# Altium PCB STM32_Board.PcbDoc (part 1 of 2)
Units mil, origin at the board's own origin, x right, y up, seen from the top; angles counter-clockwise.
Board outline 3248.03 x 2755.91 mil, 2 copper layers (Top Layer, Bottom Layer), stack 60.433 mil thick; 70 components, 76 nets, 326 pads, 150 vias.
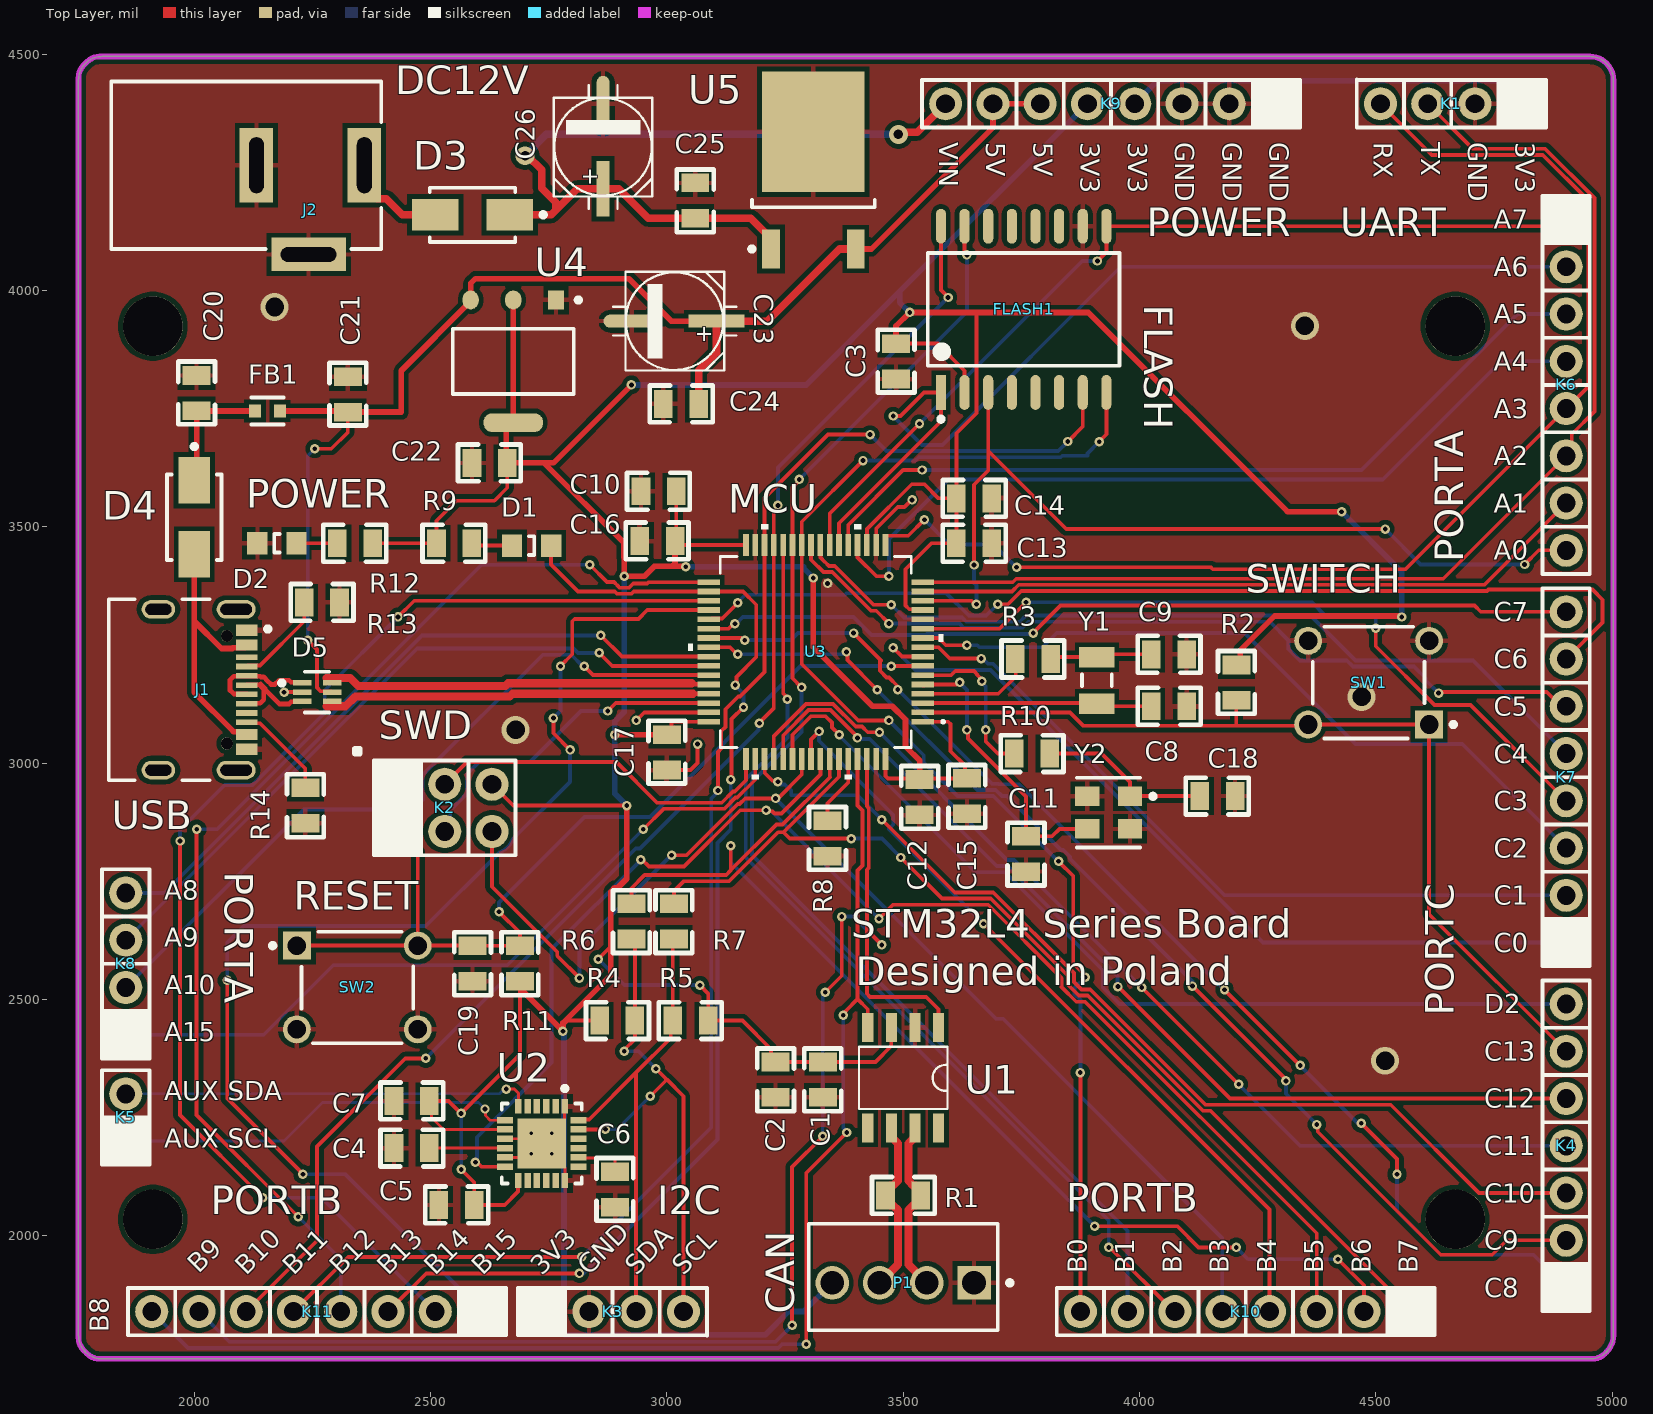
[diagram p0: Top Layer view]
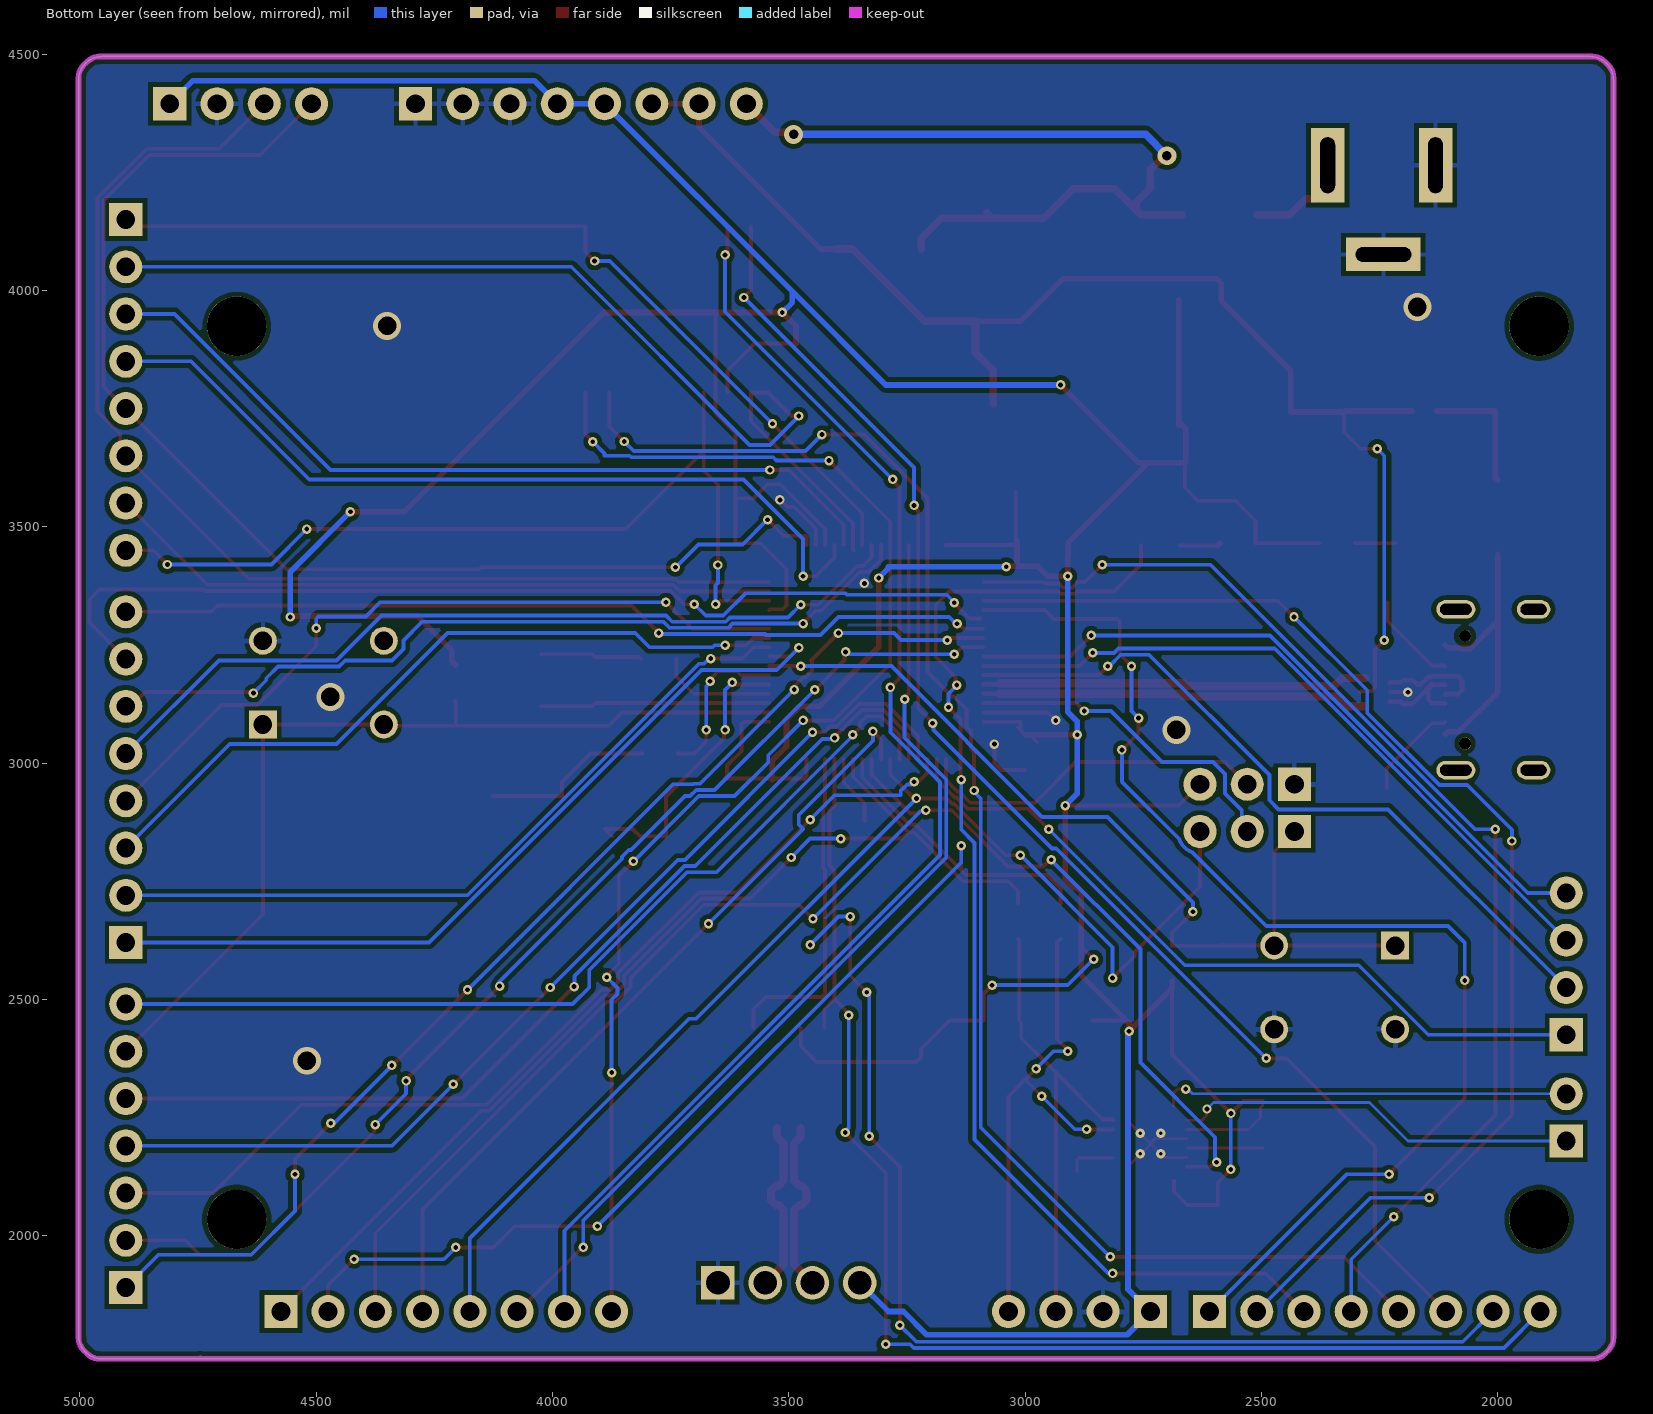
[diagram p1: Bottom Layer view, seen from below]
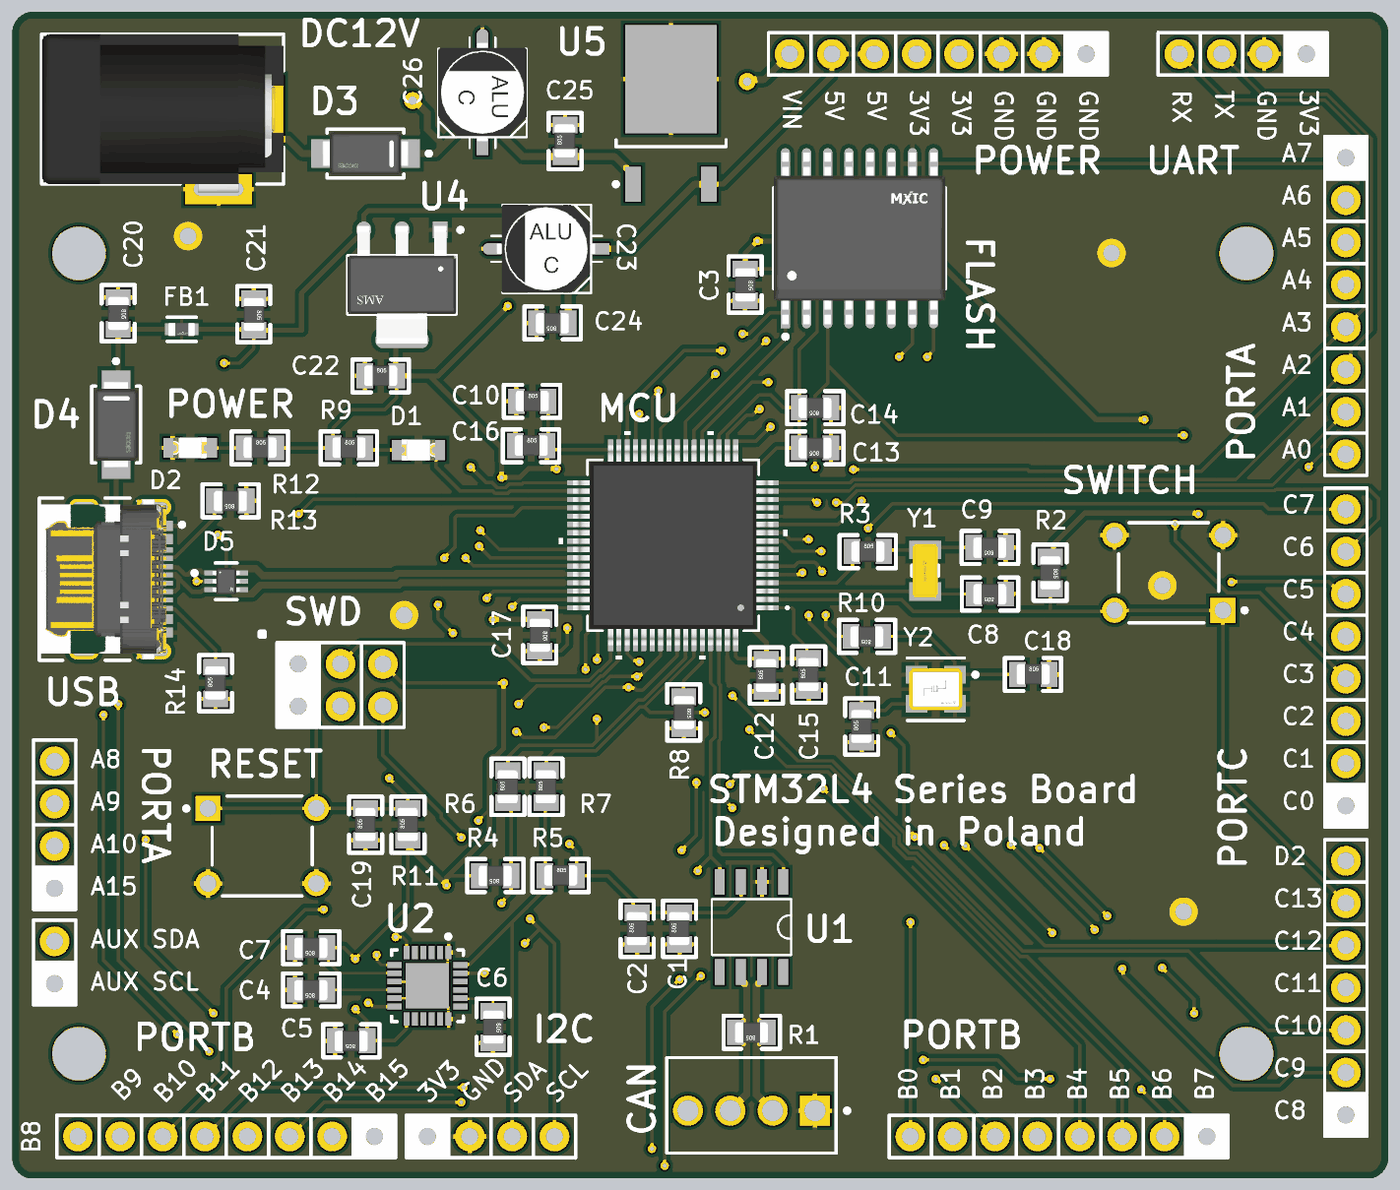
[diagram p3: 3D render of the assembled board from above, using the file's embedded part models]

## Layer stack, top to bottom
Top Solder: solder mask 0.4, Solder Resist, Dk 3.8
Top Layer: signal copper 1.378
Dielectric 1: dielectric 57.6772, FR-4, Dk 4.5
Bottom Layer: signal copper 1.378
Bottom Solder: solder mask 0.4, Solder Resist, Dk 3.8

## Board outline
1755,1789.09 ccw(c1805,1789.09) 1805,1739.09 4953.03,1739.09 ccw(c4953.03,1789.09) 5003.03,1789.09 5003.03,4445 ccw(c4953.03,4445) 4953.03,4495 1805,4495 ccw(c1805,4445) 1755,4445

## Design rules (kind name [scope] priority, off if disabled: settings)
Clearance [All] p1: gap=10 ignorepadtopadclearanceinfootprint=FALSE except(0: Arc-Hole Track-Hole SMDPad-Hole THPad-Hole Via-Hole Fill-Hole Poly-Hole Region-Hole Text-Hole; 3.94: SMDPad-THPad; 5: Arc-Arc Arc-Track Track-Track SMDPad-SMDPad; 5.91: Arc-Text Track-Text SMDPad-Text THPad-Text Via-Text Fill-Text Poly-Text Region-Text Text-Text; 7.87: Arc-SMDPad Arc-THPad Track-SMDPad Track-THPad SMDPad-Via THPad-Via; 19.68: THPad-THPad)
DiffPairsRouting DiffPairsRouting_2 [InDifferentialPair('USB_D')] p1: maxlimit=5 minlimit=5 mostfreqgap=5 toplayer_minwidth=10 toplayer_maxwidth=17.23 toplayer_prefwidth=17.23 bottomlayer_minwidth=10 bottomlayer_maxwidth=17.23 bottomlayer_prefwidth=17.23 impedanceprofiledriven=TRUE impedanceprofileid={769F5DE0-8025-4589-B34F-DB9C566C1EF3} impedanceprofilevalue=90.000000 maxuncoupledlength=500
DiffPairsRouting DiffPairsRouting_1 [InDifferentialPair('CAN')] p2: maxlimit=5 minlimit=5 mostfreqgap=5 toplayer_minwidth=17.23 toplayer_maxwidth=17.23 toplayer_prefwidth=17.23 bottomlayer_minwidth=17.23 bottomlayer_maxwidth=17.23 bottomlayer_prefwidth=17.23 impedanceprofiledriven=TRUE impedanceprofileid={769F5DE0-8025-4589-B34F-DB9C566C1EF3} impedanceprofilevalue=90.000000 maxuncoupledlength=500
DiffPairsRouting [InDifferentialPair('USB_CONN_D')] p3: maxlimit=5 minlimit=5 mostfreqgap=5 toplayer_minwidth=10 toplayer_maxwidth=17.23 toplayer_prefwidth=17.23 bottomlayer_minwidth=10 bottomlayer_maxwidth=17.23 bottomlayer_prefwidth=17.23 impedanceprofiledriven=TRUE impedanceprofileid={769F5DE0-8025-4589-B34F-DB9C566C1EF3} impedanceprofilevalue=90.000000 maxuncoupledlength=500
HoleSize [All] p1: absolutevalues=TRUE maxlimit=248.03 minlimit=7.87 maxpercent=80.000 minpercent=20.000
HoleToHoleClearance [All] p1: gap=19.68 allowstackedmicrovias=TRUE
MinimumSolderMaskSliver MinimumSolderMaskSliver_1 [HasFootprint('IS-QFN-24_V')] p1: minsoldermaskwidth=0.39
MinimumSolderMaskSliver [All] p2: minsoldermaskwidth=3.94
PlaneConnect PlaneConnect_1 [InNet('GND')] p1: pad.planeconnectstyle=Relief pad.reliefexpansion=20 pad.reliefentries=4 pad.reliefconductorwidth=10 pad.reliefairgap=10 via.planeconnectstyle=Direct via.reliefexpansion=20 via.reliefentries=4 via.reliefconductorwidth=10 via.reliefairgap=10
PlaneConnect [All] p2: planeconnectstyle=Relief reliefexpansion=20 reliefentries=4 reliefconductorwidth=10 reliefairgap=10
PolygonConnect PolygonConnect_1 [InNet('GND')] p1: thpad.connectstyle=Relief thpad.reliefconductorwidth=10 thpad.reliefentries=4 thpad.polygonreliefangle="90 Angle" thpad.airgapwidth=10 smdpad.connectstyle=Relief smdpad.reliefconductorwidth=10 smdpad.reliefentries=4 smdpad.polygonreliefangle="90 Angle" smdpad.airgapwidth=10 via.connectstyle=Direct via.reliefconductorwidth=10 via.reliefentries=4 via.polygonreliefangle="90 Angle" via.airgapwidth=10
PolygonConnect [All] p2: connectstyle=Relief reliefconductorwidth=10 reliefentries=4 polygonreliefangle="90 Angle" airgapwidth=10
RoutingVias [All] p1: holewidth=20 width=40 viastyle="Through Hole" minholewidth=7.87 minwidth=13.78 maxholewidth=248.03 maxwidth=253.94
SilkToSilkClearance [All] p1: silktosilkclearance=5.91
SilkToSolderMaskClearance [IsPad] p1: minsilkscreentomaskgap=0 clearancetoexposedcopper=TRUE
SolderMaskExpansion [All] p1: expansion=4 istentingtop=FALSE
Width [All] p1: maxlimit=1968.5 minlimit=5 preferedwidth=10 minimp=50.000000 maximp=50.000000 favimp=50.000000
23 further rules are at their usual default settings.

## Classes and differential pairs
component class STM32_Board_with_IMU: C1 C2 C3 C4 C5 C6 C7 C8 C9 C10 C11 C12 C13 C14 C15 C16 C17 C18 C19 D1 FLASH1 K1 K2 K3 K4 K5 K6 K7 K8 K10 K11 P1 R1 R2 R3 R4 R5 R6 R7 R8 R9 R10 R11 SW1 SW2 U1 U2 Y1 Y2
component class PowerSupplyAndUSB: C20 C21 C22 C23 C24 C25 C26 D2 D3 D4 D5 FB1 J1 J2 K9 R12 R13 R14 U4 U5
differential pair USB_CONN_D: +USB_CONN_D_P -USB_CONN_D_N
differential pair USB_D: +USB_D_P -USB_D_N
differential pair CAN: +CAN_P -CAN_N

## Components (designator, comment, footprint, x,y, rotation, side; value= is the part's Value field where it differs from the comment)
C1 "22p" 0805 3330,2330 r90 top
C2 "22p" 0805 3230,2330 r90 top
C3 "100n" 0805 3485,3850 r270 top
C4 "100n" 0805 2460,2185 r180 top
C5 "0.1u" 0805 2555,2065 r180 top
C6 "2.2n" 0805 2890,2097.4 r270 top
C7 "10n" 0805 2460,2285 r180 top
C8 "22p" 0805 4062.6,3120 r180 top
C9 "22p" 0805 4062.4,3230 r180 top
C10 "2.2u" 0805 2982.6,3575 r0 top
C11 "32p" 0805 3760,2807.6 r90 top
C12 "100n" 0805 3535,2927.6 r90 top
C13 "100n" 0805 3650,3465 r180 top
C14 "100n" 0805 3650,3560 r180 top
C15 "100n" 0805 3635,2930 r90 top
C16 "100n" 0805 2980,3470 r0 top
C17 "100n" 0805 3000,3022.6 r270 top
C18 "32p" 0805 4165,2930 r0 top
C19 "100n" 0805 2589,2575.75 r90 top
C20 "2.2u" 0805 2005,3782.6 r270 top
C21 "2.2u" 0805 2325,3780 r270 top
C22 "22u" 0805 2625,3635 r0 top
C23 "C+47U-6V3" PANACAP-C 3015,3935 r180 top
C24 "100n" 0805 3030,3760 r180 top
C25 "100n" 0805 3060,4190 r90 top
C26 "C+47U-6V3" PANACAP-C 2865,4305 r90 top
D1 "LED SMD 0805 Green" 0805_PAD 2713.66,3460 r180 top
D2 "LED SMD 0805 Green" 0805_PAD 2175,3465 r0 top
D3 "ES2DA-13-F" FP-SMA-MFG 2588.74,4160 r180 top value=25pF
D4 "ES2DA-13-F" FP-SMA-MFG 2000,3520 r270 top value=25pF
D5 "USBLC6-2P6" FP-SOT-666-MFG 2260,3150 r0 top
FB1 "120R" FP-BLM18-0_15-t0_8-MFG 2155,3745 r0 top
FLASH1 "MX25L51245GMI-08G" FP-MX25L51245GMI-08G-IPC_C 3755,3960 r90 top
J1 "USB4105-GF-A" FP-USB4105-GF-A-MFG 1970,3155 r270 top
J2 "694106301002" 694106301002 2110,4265 r270 top
K1 "USART2" HEADER-1X4 4810,4395 r270 top
K2 "SWD Connector" HEADER-2X3 2430,2855 r90 top
K3 "I2C1" HEADER-1X4 2735,1839.09 r90 top
K4 "PORTC_PART2" HEADER-1X7 4903.03,1890 r180 top
K5 "IMU_EXTERNAL_SENSOR" HEADER-1X2 1855,2200 r180 top
K6 "PORTA_PART1" HEADER-1X8 4903.03,4150 r0 top
K7 "PORTC_PART1" HEADER-1X8 4903.03,2620 r180 top
K8 "PORTA_PART2" HEADER-1X4 1855,2425 r180 top
K9 "POWER" HEADER-1X8 4290,4395 r270 top
K10 "PORTB_PART1" HEADER-1X8 4575,1839.09 r270 top
K11 "PORTB_PART2" HEADER-1X8 2610,1839.09 r270 top
P1 "CAN" TECO-640456-4 3500,1900 r0 top
R1 "120R" 0805 3500,2085 r180 top
R2 "10k" 0805 4205,3170 r270 top
R3 "0R" 0805 3775,3220 r0 top
R4 "2.2k" 0805 2895,2455 r180 top
R5 "2.2k" 0805 3050,2455 r0 top
R6 "0R" 0805 2925,2665 r90 top
R7 "0R" 0805 3015,2665 r90 top
R8 "10k" 0805 3340,2840 r270 top
R9 "560" 0805 2550,3465 r0 top
R10 "0R" 0805 3772.4,3020 r180 top
R11 "10k" 0805 2689,2575.75 r90 top
R12 "560R" 0805 2340,3465 r0 top
R13 "5.1k" 0805 2270,3340 r180 top
R14 "5.1k" 0805 2235,2910 r90 top
SW1 "B3F-1000" OMRON-B3F-1000-4_V 4485,3170 r180 top
SW2 "B3F-1000" OMRON-B3F-1000-4_V 2345,2525 r0 top
U1 "TCAN332GDR" SOIC-8_x1 3575,2440 r270 top
U2 "MPU-6050" IS-QFN-24_V 2735,2195 r270 top
U3 "STM32L476RGT6" LQFP64-10x10mm_STM 3315,3235 r180 top
U4 "AMS1117-3.3" FP-AMS1117-IPC_C 2675,3850 r270 top
U5 "L7805CDT-TR" TO-252_N 3310,4255 r90 top
Y1 "ABS07-32.768KHZ-T" FP-ABS07-MFG 3910,3175 r270 top
Y2 "ABM8-25.000MHZ-B2-T" FP-ABM8-MFG 3935,2895 r180 top

## Footprints (in the part's own frame and the unit in brackets; to place one, negate y for a bottom-side part, rotate by r counter-clockwise, add the part's x,y. Pads: shape width x height; smd on the part's side, far side on the other; paste and mask are expansions set on the pad)
0805 [mm]
  rect 1x1.5 smd: 1(-0.95,0) 2(0.95,0)
  silkscreen extent -1.7,-0.99 1.68,0.99, body extent -1,-0.61 1,0.64, height 0.81
0805_PAD [mm] "Chip LED, 2-Leads, Body 2.0x1.3mm, IPC Medium Density"
  rect 1.1x1.2 smd: 1(-1.05,0) 2(1.05,0)
  silkscreen extent -0.15,-0.5 0.15,0.5, body extent -1,-0.62 1,0.63, height 0.68
694106301002 [mm] "DC Power Jack Right Angled(6.4)"
  rect 4x1.8 hole 0.8 slot 3 at 0 deg: 1(0,6.35) 2(0,0.55)
  rect 1.8x4 hole 0.8 slot 3 at 90 deg: 3(4.8,3.35)
  silkscreen extent -4.5,-7.25 4.5,7.25, body extent -4.5,-7.25 5,7.25, height 10.75
FP-ABM8-MFG [mm]
  rect 1.3x1.05 smd paste+0 mask+0: 1(-1.15,-0.875) 2(1.15,-0.875) 3(1.15,0.875) 4(-1.15,0.875)
  silkscreen extent -2.5,-1.88 1.7,1.88, body extent -1.9,-1.5 1.9,1.5, height 0.25
FP-ABS07-MFG [mm]
  rect 1.1x1.9 smd paste+0 mask+0: 1(-1.25,0) 2(1.25,0)
  silkscreen extent -0.33,-0.8 0.33,0.8, body extent -1.9,-1.05 1.9,1.05, height 0.25
FP-AMS1117-IPC_C [mm]
  rect 1.004x0.872 smd paste+0 mask+0: 1(-3.295,2.29)
  rrect100% 1.004x0.872 smd paste+0 mask+0: 2(-3.295,0) 3(-3.295,-2.29)
  rrect87% 1.004x3.182 smd paste+0 mask+0: 4(3.295,0)
  silkscreen extent -3.42,-3.25 1.75,3.63, body extent -3.9,-3.35 3.9,3.35, height 0.25
FP-BLM18-0_15-t0_8-MFG [mm]
  rect 0.65x0.7 smd paste+0 mask+0: 1(-0.675,0) 2(0.675,0)
  silkscreen extent -0.87,-0.72 0.87,0.72, body extent -1.1,-0.58 1.1,0.58, height 0.25
FP-MX25L51245GMI-08G-IPC_C [mil]
  rect 73.78x21.34 smd paste+0 mask+0: 1(-175.83,175)
  rrect100% 73.78x21.34 smd paste+0 mask+0: 2(-175.83,125) 3(-175.83,75) 4(-175.83,25) 5(-175.83,-25) 6(-175.83,-75) 7(-175.83,-125) 8(-175.83,-175) 9(175.83,-175) 10(175.83,-125) 11(175.83,-75) 12(175.83,-25) 13(175.83,25) 14(175.83,75) 15(175.83,125) 16(175.83,175)
  silkscreen extent -237,-203 119,203, body extent -217,-207 217,207, height 10
FP-SMA-MFG [mm]
  rect 2.5x1.7 smd paste+0 mask+0: 1(-2,0) 2(2,0)
  silkscreen extent -3.93,-1.46 2.3,1.46, body extent -3.35,-1.56 3.35,1.56, height 0.25
FP-SOT-666-MFG [mm]
  rect 0.99x0.3 smd paste+0 mask+0: 1(-0.805,0.5) 2(-0.805,0) 3(-0.805,-0.5) 4(0.805,-0.5) 5(0.805,0) 6(0.805,0.5)
  silkscreen extent -2.02,-1.1 0.65,1.1, body extent -1.4,-0.95 1.4,0.95, height 0.25
FP-USB4105-GF-A-MFG [mm]
  rrect100% 1x2.1 hole 1.7 slot 0.6 at 0 deg paste-1000 mask+0: 1(-4.32,3.015) 2(4.32,3.015)
  rrect100% 1x1.8 hole 1.4 slot 0.6 at 0 deg paste-1000 mask+0: 3(-4.32,-1.165) 4(4.32,-1.165)
  rect 0.6x1.15 smd paste+0 mask+0: A1-B12(-3.2,3.59) A4-B9(-2.4,3.59) B1-A12(3.2,3.59) B4-A9(2.4,3.59)
  rect 0.3x1.15 smd paste+0 mask+0: A5(-1.25,3.59) A6(-0.25,3.59) A7(0.25,3.59) A8(1.25,3.59) B5(1.75,3.59) B6(0.75,3.59) B7(-0.75,3.59) B8(-1.75,3.59)
  round 0.65 hole 0.65 unplated paste-1000 mask+0: ""(-2.89,2.515) ""(2.89,2.515)
  silkscreen extent -4.86,-3.84 4.86,4.84, body extent -4.96,-3.94 4.96,4.27, height 0.25
HEADER-1X2 [mil]
  rect 70x70 hole 40: 1(0,0)
  round 70 hole 40: 2(0,-100)
  silkscreen extent -50,-150 50,50, body extent -50,-150 50,50, height 470
HEADER-1X4 [mil]
  rect 70x70 hole 40: 1(0,0)
  round 70 hole 40: 2(0,-100) 3(0,-200) 4(0,-300)
  silkscreen extent -51,-350 50,50, body extent -50,-350 50,50, height 470
HEADER-1X7 [mil]
  rect 70x70 hole 40: 1(0,0)
  round 70 hole 40: 2(0,-100) 3(0,-200) 4(0,-300) 5(0,-400) 6(0,-500) 7(0,-600)
  silkscreen extent -50,-650 50,50, body extent -50,-650 50,50, height 470
HEADER-1X8 [mil]
  rect 70x70 hole 40: 1(0,0)
  round 70 hole 40: 2(0,-100) 3(0,-200) 4(0,-300) 5(0,-400) 6(0,-500) 7(0,-600) 8(0,-700)
  silkscreen extent -50,-750 50,50, body extent -50,-750 50,50, height 470
HEADER-2X3 [mil]
  rect 70x70 hole 40: 1(0,0) 2(100,0)
  round 70 hole 40: 3(0,-100) 4(100,-100) 5(0,-200) 6(100,-200)
  silkscreen extent -50,-250 150,50, body extent -50,-250 150,50, height 470
IS-QFN-24_V [mm] "QFN, 24-Leads, Body 4x4mm, Pitch 0.5mm, Thermal Pad 2.7x2.6mm"
  rect 0.8x0.35 smd: 1(-2,1.25) 2(-2,0.75) 3(-2,0.25) 4(-2,-0.25) 5(-2,-0.75) 6(-2,-1.25) 13(2,-1.25) 14(2,-0.75) 15(2,-0.25) 16(2,0.25) 17(2,0.75) 18(2,1.25)
  rect 0.35x0.85 smd mask+0.102: 7(-1.25,-1.975) 8(-0.75,-1.975) 9(-0.25,-1.975) 10(0.25,-1.975) 11(0.75,-1.975) 12(1.25,-1.975) 19(1.25,1.975) 20(0.75,1.975) 21(0.25,1.975) 22(-0.25,1.975) 23(-0.75,1.975) 24(-1.25,1.975)
  rect 2.7x2.6 smd: 25(0,0)
  silkscreen extent -3.07,-2.15 2.15,2.15, body extent -2,-2 2,2, height 0.95
LQFP64-10x10mm_STM [mil]
  rect 47x12 smd paste+0 mask+0: 1(-226.38,147.64) 2(-226.38,127.95) 3(-226.38,108.27) 4(-226.38,88.58) 5(-226.38,68.9) 6(-226.38,49.21) 7(-226.38,29.53) 8(-226.38,9.84) 9(-226.38,-9.84) 10(-226.38,-29.53) 11(-226.38,-49.21) 12(-226.38,-68.9) 13(-226.38,-88.58) 14(-226.38,-108.27) 15(-226.38,-127.95) 16(-226.38,-147.64) 33(226.38,-147.64) 34(226.38,-127.95) 35(226.38,-108.27) 36(226.38,-88.58) 37(226.38,-68.9) 38(226.38,-49.21) 39(226.38,-29.53) 40(226.38,-9.84) 41(226.38,9.84) 42(226.38,29.53) 43(226.38,49.21) 44(226.38,68.9) 45(226.38,88.58) 46(226.38,108.27) 47(226.38,127.95) 48(226.38,147.64)
  rect 12x47 smd paste+0 mask+0: 17(-147.64,-226.38) 18(-127.95,-226.38) 19(-108.27,-226.38) 20(-88.58,-226.38) 21(-68.9,-226.38) 22(-49.21,-226.38) 23(-29.53,-226.38) 24(-9.84,-226.38) 25(9.84,-226.38) 26(29.53,-226.38) 27(49.21,-226.38) 28(68.9,-226.38) 29(88.58,-226.38) 30(108.27,-226.38) 31(127.95,-226.38) 32(147.64,-226.38) 49(147.64,226.38) 50(127.95,226.38) 51(108.27,226.38) 52(88.58,226.38) 53(68.9,226.38) 54(49.21,226.38) 55(29.53,226.38) 56(9.84,226.38) 57(-9.84,226.38) 58(-29.53,226.38) 59(-49.21,226.38) 60(-68.9,226.38) 61(-88.58,226.38) 62(-108.27,226.38) 63(-127.95,226.38) 64(-147.64,226.38)
  silkscreen extent -273,-270 270,270, body extent -236,-236 236,236, height 63
OMRON-B3F-1000-4_V [mm] "TH, 4-Leads, Body 6x6mm"
  rect 1.5x1.5 hole 1 paste+0: 1(-3.25,2.25)
  round 1.5 hole 1 paste+0: 2(3.25,2.25) 4(3.25,-2.25)
  round 1.5 hole 1 paste+0 mask+0.102: 3(-3.25,-2.25)
  silkscreen extent -4.68,-3 3,3, body extent -3,-3 3,3, height 4.5
PANACAP-C [mm]
  rect 3x0.7 smd: +(-2.286,0)
  oval 3x0.7 smd: -(2.286,0)
  silkscreen extent -3.35,-2.65 3.28,2.65, body extent -2.95,-2.65 2.95,2.65, height 5.41
SOIC-8_x1 [mm]
  rect 1.55x0.6 smd: 1(0,0) 2(0,-1.27) 3(0,-2.54) 4(0,-3.81) 5(5.4,-3.81) 6(5.4,-2.54) 7(5.4,-1.27) 8(5.4,0)
  silkscreen extent 1.02,-4.28 4.38,0.48, body extent 0.61,-4.5 4.77,0.7, height 1.75
TECO-640456-4 [mm] "Through Hole, 4-Leads, Body 10.16x5.72mm, Pitch 2.54mm"
  rect 1.8x1.8 hole 1.27 paste+0: 1(3.81,0)
  round 1.8 hole 1.27 paste+0: 2(1.27,0) 3(-1.27,0) 4(-3.81,0)
  silkscreen extent -5.08,-2.54 5.86,3.18, body extent -5.08,-2.54 5.08,3.18, height 10.03
TO-252_N [mm] "D-PAK, 4-Leads, Body 6.1x6.5mm, Pitch 2.28mm, Lead Span 9.7mm, IPC Medium Density"
  rect 2.1x0.95 smd: 1(-4.25,2.28) 3(-4.25,-2.28)
  rect 6.5x5.5 smd: 4(2.05,0)
  silkscreen extent -4.37,-3.3 -1.6,3.43, body extent -2,-3.3 4.2,3.3, height 2.4

## Part data
C1 C2 C3 C4 C5 C6 C7 C8 C9 C10 C11 C12 C13 C14 C15 C16 C17 C18 C19 C20 C21 C22 C24 C25: library part Kondensator
C23 C26: "GENERIC CAPACITOR POLARISED", Supplier Part Number 1=PCE4375TR-ND, Supplier 1=Digi-Key
D1 D2: "WURTH ELEKTRONIK - 150080GS75000 - LED, Green, SMD, 0805, 30 mA, 3.2 V, 520 nm", Case Code (Imperial)=0805, Case Code (Metric)=2012, Color=Green, Forward Current=30mA, Forward Voltage=3.2V, Lens Color=Colorless, Manufacturer="Wurth Electronics", Manufacturer Part Number=150080GS75000, Max Operating Temperature=85°C, Min Operating Temperature=-40°C, Package Quantity=1, Test Current=20mA, Case/Package=0805, Category=LEDs, ComponentLink1Description=https://datasheet.ciiva.com/29563/150080gs75000-29563008.pdf?src-supplier=Digi-Key, ComponentLink1URL=https://datasheet.ciiva.com/29563/150080gs75000-29563008.pdf?src-supplier=Digi-Key, ComponentLink2Description=https://datasheet.ciiva.com/29279/759434-da-01-en-chipled-0805-w-kl-gruen-150080gs75000-29279039.pdf?src-supplier=Conrad, ComponentLink2URL=https://datasheet.ciiva.com/29279/759434-da-01-en-chipled-0805-w-kl-gruen-150080gs75000-29279039.pdf?src-supplier=Conrad, Dominant Wavelength=520nm, Height=0.8mm, Length=2mm, Lens Size=1.25mm, Lens Style=Clear,Flat,Rectangular, Lens Transparency=Clear, Luminous Intensity=450mcd, Mounting Technology="Surface Mount", Packaging="Cut Tape", Reach SVHC Compliant=Unknown, RoHS=Yes, RoHS Compliant=Yes, Series=WL-SMCW, Stock 1=31800, Supplier 1=Rs, Viewing Angle=140°, Wavelength=520nm, Width=1.25mm
D3 D4: library part CMP-12791-000014-1, "DIODE GEN PURP 200V 2A SMA", Capacitance=25pF, Forward Current=2A, Manufacturer="Diodes Inc.", Max Junction Temp=+150°C, Max Repetitive Reverse Voltage=200V, Max Surge Forward Current=50A, Package=SMA, Peak Reverse Current=5uA, Temperature="-55°C to +150°C", Temperature Range Low=-55°C, Automotive=No, Category=Diode, ComponentLink2Description=Datasheet, ComponentLink2URL=https://www.diodes.com/assets/Datasheets/ds14002.pdf, Device Class L1="Discrete Semiconductors", Device Class L2=Diodes, Device Class L3="Rectifier Diodes", Digikey Description="DIODE GEN PURP 200V 2A SMA", Footprint Url=https://www.diodes.com/assets/Package-Files/SMA.pdf, Height=2.4mm, Lead Free=Yes, Manufacturer Part Number=ES2DA-13-F, Mouser Description="Rectifiers RECTIFIER SUPER FAST \"F\" LEAD FREE", Octopart=https://octopart.com/es2da-13-f-diodes+inc.-328903, Reverse Voltage=200V, RoHS=TRUE, Standoff Height=0.05mm, Temperature Range High=+150°C
D5: library part CMP-12225-000058-1, "TVS DIODE 5.25V 17V SOT666", Breakdown Voltage=6V, Capacitance=3.5pF, Case/Package=SOT-666, Clamping Voltage=17V, Leakage Current=150nA, Max Operating Temperature=125°C, Min Operating Temperature=-40°C, Operating Supply Voltage=5V, Package Quantity=1, Peak Pulse Current=5A, Power Line Protection=Yes, Test Current=1mA, Contact Plating=Tin, Depth=1.3mm, Direction=Unidirectional, Element Configuration=Dual, ESD Protection=Yes, Height=0.6mm, Lead Free="Lead Free", Length=1.7mm, Max Breakdown Voltage=6V, Max Reverse Leakage Current=150nA, Min Breakdown Voltage=6V, Mount="Surface Mount", Number of Bidirectional Channels=2, Number of Channels=2, Number of Elements=1, Number of Pins=6, Packaging="Tape and Reel", Polarity=Unidirectional, Radiation Hardening=No, REACH SVHC="No SVHC", Reverse Breakdown Voltage=6V, Reverse Standoff Voltage=5V, Termination=SMD/SMT, Width=1.3mm, Working Voltage=5V
FB1: library part CMP-0686-00437-3, "Chip Ferrite Bead, 0603, 120Ω @ 100MHz, 0.18Ω, 25%, 800mA", Case/Package=0603, Current Rating=500mA, DC Resistance (DCR)=180mR, Max Operating Temperature=125°C, Min Operating Temperature=-55°C, Package Quantity=1000, Tolerance=25%, Height=0.8mm, Impedance=120R, Length=1.6mm, Max DC Current=500mA, Number of Circuits=1, Number of Pins=2, Packaging=Bulk, RoHS Compliant=Yes, Series=BLM18A, Shielding=Unshielded, Termination=SMD/SMT, Width=0.8mm
FLASH1: library part CMP-105207-000008-1, "IC FLASH 512MBIT SPI/QUAD 16SOP", RoHS Compliant=Yes
J1: library part CMP-245163-000001-1, "CONN RCPT USB2.0 TYPEC 5A", Current Rating=5/6.25/1.25/0.25A, Manufacturer=GCT, Package=0, Temperature="-40°C to +85°C", Temperature Range High=+85°C, Temperature Range Low=-40°C, Voltage Rating=20V, Automotive=No, Category=Conn, ComponentLink2Description=Datasheet, ComponentLink2URL=https://gct.co/files/drawings/usb4105.pdf, Conn Orientation="Right Angle", Contact Material=Gold,Nickel, Device Class L1=Connectors, Device Class L2="USB Connectors", Device Class L3=unset, Digikey Description="CONN RCPT USB2.0 TYPEC 5A", Height=3.46mm, Is Female=yes, Lead Free=Yes, Manufacturer Part Number=USB4105-GF-A, Number Of Contacts=16, Octopart=https://octopart.com/usb4105-gf-a-gct-106627878, RoHS=TRUE, Usb Standard="USB 2.0"
J2: library part CMP-1502-00188-1, "DC Power Jack Connector WR-DC, Male, Right Angled, THT, 5 A, 24 V", Manufacturer="Wurth Elektronik", Operating Temperature=-40to85degC, Rated Current=5A, Working Voltage=24V, Datasheet URL=http://katalog.we-online.de/em/datasheet/6941xx301002.pdf, Gender=Male, Manufacturer URL=http://www.we-online.de, Mounting Technology=THT, Opening Diameter=6.4mm, Orientation=RightAngled, Package Reference=694106301002, Packaging=Bag, Part Number=694106301002, Plug Inner Diameter=2.05mm, Plug Outer Diameter=5.5mm, Publisher=WurthElektronik
K1 K3 K8: library part HEADER-1X4, Supplier Part Number 1=S1011E-36-ND, Supplier 1=Digi-Key
K2: library part HEADER-2X3
K4: library part HEADER-1X7, Supplier Part Number 1=S1011E-36-ND, Supplier 1=Digi-Key
K5: library part HEADER-1X2, Supplier Part Number 1=S1011E-36-ND, REEL=TH, Supplier 1=Digi-Key
K6 K7 K9 K10 K11: library part HEADER-1X8, Supplier Part Number 1=S1011E-36-ND, Supplier 1=Digi-Key
P1: library part CMP-2000-05419-1, "Male Header, Pitch 2.54 mm, 1 x 4 Position, Height 10.03 mm, Tail Length 3.56 mm, RoHS, Bulk", Color=White, Current, Rating="5 /  / A", Flammability Rating=UL94V-0, Manufacturer="TE Connectivity", Temperature, Operating="-55to+105 /  / degC", Voltage, Rating="250 /  / V", Agency Approvals=CSA,UL, Angle=Straight, Brand/Series=MTA-100Series, Color, Housing=White, Connector Type=MTA-100, Contact Centerline Spacing="0.100 /  / in.", Contact Mating Area Plating=Tin, Contact Plating=Tin, Contact Shape=Square, Contact Termination Area Plating=Tin, Datasheet URL=https://datasheet.ciiva.com/16286/eng-ds-82056-mta-0608-16286228.pdf, Datasheet Version=Dec-14, Length, Overall="0.4 /  / \"", Length, Pin="0.14 /  / \"", Length, Terminal Post="0.14 /  / in.", Manufacturer URL=http://www.te.com/, Material, Contact=CopperAlloy, Material, Housing=Polyester, Mount Angle=Vertical, Mounting Hole Size="0.04 /  / \"", Mounting Type=PCMount, Number Of Contacts=4, Number of Positions=4, Number of Rows=1, Pin Spacing="0.1 /  / \"", Primary Type=InterconnectSystem, Size, Post="0.025 /  / in.", Special Features=Pinstrip, Standards=RoHSCompliant,ELVCompliant,UL94V-0, Termination=Solder, Type=PCBPlug
R1 R2 R3 R4 R5 R6 R7 R8 R9 R10 R11 R12 R13 R14: library part Rezystor
SW1 SW2: library part CMP-1677-00002-1, "Tactile Switch, SPST-NO, 0.05 A, 5 to 24 V, -25 to 70 degC, 4-Pin THD, RoHS, Bulk", Capacitance="-45 f", Current Rating="1.5 A", Max Operating Temperature="70 degC", Min Operating Temperature="-40 degC", Package Quantity=1080, Voltage Rating="150 V", ComponentLink1Description="Manufacturer URL", ComponentLink1URL=http://www.omron.com/, ComponentLink2Description=Datasheet, ComponentLink2URL=http://www.omron.com/ecb/products/pdf/en-b3f.pdf, Contact Material=Brass, Contact Plating=Gold, DatasheetVersion=Jan-15, Gender=Female, Height="14.99 mm", Lead Pitch="1.27 mm", Length="18.34 mm", Mount="Through Hole", PackageDescription="4-Pin Through Hole Device, Body 6 x 6 mm", PackageReference=B3F-1000, Packaging=Tray, Pins=8, Radiation Hardening=No, RoHSCompliant=true, Shielding=Shielded, Width="25.4 mm"
U1: "Can Transceiver"
U2: library part CMP-1753-00002-2, "3-Axis Gyroscope, Accelerometer and a Digital Motion Processor(TM) (DMP), 2.375 to 3.46 V, -40 to 85 degC, 24-Pin QFN, RoHS, Tape and Reel", Manufacturer=InvenSense, Standard Package=5,000, Category=Sensors,Transducers, Datasheet URL=http://datasheet.octopart.com/MPU-6050-InvenSense-datasheet-14421344.pdf, Datasheet Version="Rev. 3.3, 05/2012", Dynamic Catalog=MPU-6000™Series, Family=Multifunction, Featured Product=MPU-60506-Axis,IntegratedI²CSolution, Manufacturer URL=http://www.invensense.com/, Online Catalog=MPU-6000™Series, Other Names="1428-1007-2 / MPU6050", Output Type=Digital, Sensor Type=MotionTracking, Unit PriceUSD=Digital
U3: "No Description Available", Mfr_Name=STMicroelectronics, RefDes=RefDes, Type=Type
U4: library part CMP-209535-000001-1, "LDO Voltage Regulators 1A, 3.3V", Dropout Voltage=1.1V, Manufacturer="Advanced Monolithic Systems", Max Junction Temp=+125°C, Max Power Dissipation=1.2W, Max Supply Voltage=15V, Nominal Supply Current=5mA, Output Current=1A, Output Voltage=3.3V, Package=AMS1117, Temperature="-40°C to +125°C", Temperature Range Low=-40°C, Automotive=No, Category=IC, ComponentLink2Description=Datasheet, ComponentLink2URL=http://www.advanced-monolithic.com/pdf/ds1117.pdf, Device Class L1="Integrated Circuits (ICs)", Device Class L2="Power Management ICs", Device Class L3="Voltage Regulators - Linear", Height=1.8mm, Ipc Land Pattern Name=SOT229P700X180-4, Lead Free=Yes, Manufacturer Part Number=AMS1117-3.3, Number Of Outputs=1, Octopart=https://octopart.com/ams1117-3.3-advanced+monolithic+systems-25899300, Output Type=Fixed, RoHS=TRUE, Standoff Height=0.64mm, Temperature Range High=+125°C
U5: library part CMP-0244-00216-1, "Positive Voltage Regulator, 3-Pin DPAK, Tape and Reel", ComponentLink1Description="Manufacturer URL", ComponentLink1URL=http://www.st.com, ComponentLink2Description=Datasheet, ComponentLink2URL=http://www.st.com/internet/com/TECHNICAL_RESOURCES/TECHNICAL_LITERATURE/DATASHEET/CD00000444.pdf, DatasheetVersion=16/11/2011, PackageDescription="3-Pin Transistor Outline Package 2.28 mm Pitch, 9.7 mm Lead Span (DPAK)", PackageReference=TO-252, PackageVersion=2011
Y1: library part CMP-0447-00001-4, "Crystal 32.768kHz ±20ppm (Tol) 12.5pF FUND 70kΩ 2-Pin CSMD T/R", Case/Package=CSMD, ESR (Equivalent Series Resistance)=70kR, Frequency=32.768kHz, Frequency Tolerance=20ppm, Load Capacitance=12.5pF, Max Operating Temperature=85°C, Min Operating Temperature=-40°C, Operating Frequency="32.768 kHz", Package Quantity=3000, Depth=1.5mm, Height=0.9mm, Lead Free="Lead Free", Length=3.2mm, Number of Pins=2, Packaging="Tape and Reel", Radiation Hardening=No, REACH SVHC="No SVHC", RoHS Compliant=Yes, Series=ABS07, Series Resistance=70kR, Termination=SMD/SMT, Tolerance=20ppm, Width=1.5mm
Y2: library part CMP-27762-013668-1, "Crystal 25MHz ±20ppm 18pF SMD-4 3.2mm x 2.5mm", Case/Package=CSMD, ESR (Equivalent Series Resistance)=50R, Frequency=25MHz, Frequency Stability=50ppm, Frequency Tolerance=20ppm, Load Capacitance=18pF, Max Operating Temperature=70°C, Min Operating Temperature=-20°C, Operating Frequency="25 MHz", Package Quantity=1000, Resistor Type=Ceramic, Depth=2.5mm, Height=0.031inch, Lead Free="Lead Free", Length=3.2mm, Mount="Surface Mount", Number of Pins=4, Packaging="Tape and Reel", Radiation Hardening=No, REACH SVHC="No SVHC", Series=ABM8, Series Resistance=50R, Termination=SMD/SMT, Tolerance=20ppm, Width=0.098inch

## Free pads (board coordinates)
  round 125.98 hole 125.98: MH(1912.48,2034.37) MH(1912.48,3924.13) MH(4668.39,2034.37) MH(4668.39,3924.13)

## Via types
v1: diameter 20, hole 10, Top Layer to Bottom Layer, 139 vias
v2: diameter 59.06, hole 39.37, Top Layer to Bottom Layer, 5 vias
v3: diameter 19.68, hole 7.87, Top Layer to Bottom Layer, 4 vias
v4: diameter 40, hole 20, Top Layer to Bottom Layer, 2 vias

## Nets (pads, with @x,y where several pads share a name; then routed paths per layer and width w, separated by ;. In a path a pad name is that pad's centre, name@x,y a point inside that pad or via, vN(x,y) a via of type N, cw(c..) or ccw(c..) an arc to the next point about the centre after c; other vN are vias at no path point)
+3V3: C1.2 C2.2 C3.1 C5.1 C7.1 C10.2 C12.2 C13.2 C14.2 C15.2 C16.2 C17.1 C22.2 FLASH1.2 K1.1 K2.6 K3.1 K9.4 K9.5 P1.4 R2.1 R4.2 R5.2 R9.1 R11.1 R12.2 U1.3 U2.8 U2.13 U3.1 U3.13 U3.19 U3.32 U3.48 U3.64 U4.2 U4.4 | length 13315.5
  Top Layer w6: C7.1@2497.4,2285 2497.4,2275.16 2501.72,2270.84 2501.72,2249.99 2527.18,2224.53 U2.8@2657.24,2224.53
  Top Layer w8: R12.2@2377.4,3465 R9.1@2512.6,3465 2512.6,3512.6 2555,3555 2635,3555 2662.4,3582.4 C22.2@2662.4,3625.16 ; C7.1@2497.4,2285 2538.21,2285 v1(2564.64,2258.57) 2689,2382.92 R11.1@2689,2523.4 ; v1(2565,2140) 2592.4,2112.6 C5.1@2592.4,2065 2656.98,2065 2685.21,2093.23 2685.21,2115.68 U2.13@2685.79,2116.26 ; K2.6@2630,2955 2675,2910 v1(2915,2910) v1@2913.13,2908.13 ; C22.2@2660.48,3623.23 C22.2@2662.4,3625.16 ; C22.2@2662.4,3635 C22.2@2662.4,3625.16 ; 2780.14,2445.14 2790,2455 R4.2@2857.6,2455 ; v1(2855,2585) 2880,2610 2881.6,2610 ; C17.1@2974.47,3044.31 C17.1@2990.16,3060 ; C17.1@3000,3060 C17.1@3009.69,3069.69 ; C17.1@3015.69,3075.69 C17.1@3009.69,3069.69 ; C10.2@3020,3575 3020,3472.6 C16.2@3017.4,3470 3026.02,3461.38 U3.32@3167.36,3461.38 ; v1(3070,2530) 3087.4,2512.6 R5.2@3087.4,2455 3160,2455 3220.6,2394.4 3220.6,2376.8 C2.2@3230,2367.4 C1.2@3330,2367.4 3441.29,2367.4 3475,2401.11 U1.3@3475,2440 ; U3.48@3088.62,3087.36 3009.69,3087.36 C17.1@3009.69,3069.69 ; U3.19@3423.27,3461.38 3423.27,3495.09 3518.18,3590 3545,3590 3575,3560 C14.2@3612.6,3560 ; U3.64@3462.64,3008.62 3462.64,2972.47 3467.71,2967.4 3535,2967.4 C15.2@3635,2967.4 3630.6,2971.8 3630.6,2994.4 3600,3025 3600,3082.68 3595.31,3087.36 U3.1@3541.38,3087.36 ; C3.1@3485,3887.4 3572.6,3887.4 3630,3830 FLASH1.2@3630,3784.17 ; U3.13@3541.38,3323.58 3539.57,3325.39 3512.96,3325.39 3505,3333.35 3505,3410 3560,3465 C13.2@3612.6,3465 C14.2@3612.6,3560 ; 3655,3953.36 3655,3740 3612.6,3697.6 C14.2@3612.6,3560
  Top Layer w12: U4.4@2669.54,3714.81 U4.4@2675,3720.28 ; U4.4@2675,3714.81 U4.4@2675,3720.28 ; U4.2@2675,3979.72 U4.4@2675,3720.28 ; R11.1@2689,2538.35 2689,2523.4 v1(2780.14,2432.27) 2780.14,2445.14 2780.14,2450.14 2881.6,2551.6 2881.6,2610 2881.6,2727.83 2889.73,2735.96 2895.96,2735.96 2915,2755 v1(2915,2910) ; v1(2890,3060) 2990.16,3060 C17.1@3000,3060 ; v1(2925,3800) 2760,3635 2740,3635 ; C16.2@3017.4,3470 3017.4,3422.4 3011.38,3416.38 ; v1(3040,3415) 3038.62,3416.38 3011.38,3416.38 ; v1(3310,3391.45) 3310,3245 3435,3120 3476.77,3120 3505,3091.77 3505,3035 3535,3005 3535,2967.4 C12.2@3535,2965 ; C3.1@3485,3887.4 3485,3924.55 v1(3513.81,3953.36) 3655,3953.36 3891.64,3953.36 4313.17,3531.83 v1(4427.64,3531.83) ; R2.1@4205,3207.4 4213.06,3215.46 4213.06,3238.06 4286,3311 4547.32,3311 4547.81,3310.51 4553.47,3310.51 v1(4555,3308.98) ; U4.4@2675,3720.28 2672.92,3720.28 2660,3707.36 2660,3637.4 C22.2@2662.4,3635 2740,3635 ; 2740,3635 2909.04,3465.96 2909.04,3434.73 2910,3433.76 v1(2910,3395) 2952.24,3395 2973.62,3416.38 3011.38,3416.38
  Bottom Layer w8: v1(2564.64,2258.57) 2564.82,2258.39 2564.82,2140.18 v1(2565,2140) ; v1(2855,2585) 2910,2530 v1(3070,2530)
  Bottom Layer w12: v1(2780.14,2432.27) 2780.14,2430.1 2782.5,2427.74 2782.5,1886.59 K3.1@2735,1839.09 2783.87,1790.22 3208.45,1790.22 3257.71,1839.48 3289.48,1839.48 P1.4@3350,1900 ; v1(2910,3395) 2910,3108.23 2890,3088.23 v1(2890,3060) 2890,2935 v1(2915,2910) ; v1(2925,3800) 3295,3800 3492.5,3997.5 ; v1(3040,3415) 3290,3415 3290,3411.45 v1(3310,3391.45) ; v1(3513.81,3953.36) 3492.5,3974.67 3492.5,3997.5 ; v1(4427.64,3531.83) 4555,3404.47 v1(4555,3308.98) ; K1.1@4810,4395 4761.13,4443.87 4038.87,4443.87 K9.4@3990,4395 K9.5@3890,4395 3492.5,3997.5
+5V: C21.2 C23.+ C24.1 D5.5 FB1.2 K9.6 K9.7 U4.3 U5.3 | length 2930.6
  Top Layer w8: v1(2240,3260) 2259.67,3240.33 2259.67,3159.52 2267.29,3151.91 2289.79,3151.91 D5.5@2291.69,3150 ; v1(2255,3665) 2290,3665 2325,3700 C21.2@2325,3742.6
  Top Layer w12: FB1.2@2181.57,3745 2315.16,3745 2322.6,3745 C21.2@2325,3742.6 2437.87,3742.6 2437.87,3830.15 2584.84,3977.12 U4.3@2584.84,3979.72 2584.84,4014.84 2595,4025 2919.38,4025 3009.38,3935 3067.4,3935 3073.18,3935 C23.+@3105,3935 ; U5.3@3399.76,4087.68 3432.68,4087.68 3690,4345 K9.7@3690,4395 K9.6@3790,4395
  Top Layer w16: C24.1@3067.4,3760 3067.4,3830.63 3095.17,3858.39 3095.63,3858.39 3105,3867.76 C23.+@3105,3935 3212.89,3935 3365.57,4087.68 U5.3@3399.76,4087.68
  Bottom Layer w8: v1(2240,3260) 2240,3650 v1(2255,3665)
CAN_N: P1.2 R1.1 U1.7 | length 377
  Top Layer w17.23: U1.7@3525,2227.4 3525,2208.7 3511.12,2194.82 3511.12,2116.01 3521.21,2105.91 3526.33,2105.91 3537.4,2094.84 R1.1@3537.4,2085 3537.4,2075.16 3526.33,2064.09 3521.21,2064.09 3511.12,2053.99 3511.12,1938.88 P1.2@3550,1900
CAN_P: P1.3 R1.2 U1.6 | length 377
  Top Layer w17.23: P1.3@3450,1900 3488.88,1938.88 3488.88,2053.99 3478.79,2064.09 3473.67,2064.09 3462.6,2075.16 R1.2@3462.6,2085 3462.6,2094.84 3473.67,2105.91 3478.79,2105.91 3488.88,2116.01 3488.88,2194.82 3475,2208.7 U1.6@3475,2227.4
FLASH_RESET: FLASH1.3 K6.8 U3.14 | length 1914.2
  Top Layer w8: U3.14@3541.38,3343.27 3644.49,3343.27 3651.75,3336 v1(3655,3336) ; v1(3650,3419) 3650,3588.6 3680,3618.6 3680,3660 ; FLASH1.3@3680,3784.17 3680,3660 ; v1(4520,3495) 3845,3495 3680,3660 ; v1(4815,3420) 4845,3450 K6.8@4903.03,3450
  Bottom Layer w8: v1(3650,3419) 3650,3381.15 3655,3376.15 v1(3655,3336) ; v1(4520,3495) 4595,3420 v1(4815,3420)
GND: C1.1 C2.1 C3.2 C4.2 C5.2 C6.2 C7.2 C8.1 C9.1 C10.1 C11.1 C12.1 C13.1 C14.1 C15.1 C16.1 C17.2 C18.2 C19.1 C20.1 C21.1 C22.1 C23.- C24.2 C25.2 C26.- D2.1 D5.2 FLASH1.10 J1.A1-B12 J1.B1-A12 J2.2 J2.3 K1.2 K2.2 K3.2 K9.1 K9.2 K9.3 P1.1 R8.2 R13.1 R14.1 SW1.3 SW1.4 SW2.3 SW2.4 U1.2 U2.1 U2.9 U2.11 U2.18 U2.25 U3.12 U3.18 U3.31 U3.47 U3.63 U4.1 U5.4 Y2.2 Y2.4 | length 825.1
  Top Layer w6: U2.11@2657.24,2165.47 2705.47,2165.47 v3(2713.35,2173.35) U2.25@2735,2195 ; U2.9@2657.24,2204.84 U2.25@2725.16,2204.84 ; U2.18@2784.21,2116.26 2784.21,2143.82 2735,2193.03 U2.25@2735,2195 ; U2.1@2784.21,2273.74 2783.18,2272.71 2783.18,2243.18 v3(2756.65,2216.65) U2.25@2735,2195
  Top Layer w8: v1(2190,3150) D5.2@2228.31,3150 ; U2.25@2725.16,2204.84 U2.25@2735,2195 ; v1(2935,3090) 2952.05,3107.05 U3.47@3088.62,3107.05 ; C17.2@3000,2985.2 3050.2,2985.2 3065,3000 v1(3065,3040) ; v1@3064.65,3040 v1(3065,3040) ; v1@3067.3,3037.7 v1(3065,3040) ; U3.18@3444.76,3463.19 U3.18@3442.95,3461.38 3442.95,3496.39 3488.48,3541.92 3502.54,3541.92 3517.35,3556.73 v1(3518.85,3556.73) ; v2(4470,3140) v2@4472,3142
  other v1: 3340,3380
  other v2: 4520,2370 2680,3070 4350,3925 2170,3965
  other v3: 2756.65,2173.35 2713.35,2216.65
HSE_OSC_OUT: C18.1 R10.1 Y2.1 | length 372.5
  Top Layer w8: R10.1@3809.8,3020 3920,3020 3980.28,2959.72 Y2.1@3980.28,2929.45 ; Y2.1@3980.83,2930 C18.1@4127.6,2930
IMU_AUX_CL: K5.1 U2.7 | length 859.2
  Top Layer w6: v1(2615.21,2267.92) 2616.08,2267.05 2616.08,2253.92 2625.79,2244.21 U2.7@2657.24,2244.21
  Bottom Layer w6: K5.1@1855,2200 2189.8,2200 2271.37,2281.57 2601.57,2281.57 v1(2615.21,2267.92)
IMU_AUX_DA: K5.2 U2.6 | length 866.1
  Top Layer w6: v1(2660,2310) 2677.13,2310 2685.79,2301.34 U2.6@2685.79,2273.74
  Bottom Layer w6: K5.2@1855,2300 2646.21,2300 2656.21,2310 v1(2660,2310)
IMU_CPOUT: C6.1 U2.20 | length 105
  Top Layer w6: U2.20@2812.76,2165.47 2814.22,2164.01 2886.49,2164.01 2890,2160.5 C6.1@2890,2134.8
IMU_INT: K10.3 U2.12 U3.57 | length 3093
  Top Layer w8: v1(2595,2155) 2598.25,2155 2607.46,2145.79 U2.12@2657.24,2145.79 ; v1(2945,2795) 2948.11,2795 2962.11,2781 3036.38,2781 3155.38,2900 v1(3210,2900) 3212.3,2897.7 3223.54,2897.7 3228.07,2893.17 3242.6,2893.17 3324.84,2975.42 U3.57@3324.84,3008.62 ; v1(3448.93,2670.6) 3478.33,2700 3680,2700 3835.23,2544.77 3835.23,2526.01 3866.3,2494.95 3885.05,2494.95 4375,2005 K10.3@4375,1839.09
  Bottom Layer w8: v1(2595,2155) 2597.3,2157.3 2597.3,2164.75 2598.23,2165.69 2598.23,2208.23 2756.14,2366.14 2756.14,2606.14 v1(2945,2795) ; v1(3210,2900) 3212.3,2897.7 3221.82,2897.7 v1(3448.93,2670.6)
IMU_REGOUT: C4.1 U2.10 | length 159.9
  Top Layer w6: C4.1@2497.4,2185 2497.56,2185.16 U2.10@2657.24,2185.16
IMU_SCL: K3.4 R4.1 R6.1 U2.23 | length 1102.6
  Top Layer w8: U2.23@2812.76,2224.53 2812.99,2224.76 2869.76,2224.76 v1(2870,2225) ; v1(2910,2390) 2910,2393.25 2932.4,2415.65 2932.4,2620.2 R6.1@2925,2627.6 ; v1(2965,2295) 2997.5,2327.5 2997.5,2332.5 ; v1(2976.97,2353.03) 2997.5,2332.5 ; K3.4@3035,1839.1 3035,2295 3000,2330 2997.5,2332.5
  Bottom Layer w8: v1(2870,2225) 2895,2225 v1(2965,2295) ; v1(2910,2390) 2940,2390 v1(2976.97,2353.03)
IMU_SDA: K3.3 R5.1 R7.1 U2.24 | length 985.6
  Top Layer w8: U2.24@2812.76,2244.21 2814.32,2245.78 2835.78,2245.78 2935,2345 ; K3.3@2935,1839.09 2935,2345 ; R7.1@3015,2627.6 3012.6,2625.2 R5.1@3012.6,2455 3008.16,2450.56 3008.16,2418.16 2935,2345